# EAGLE board tinycopter_v2 (EAGLE 6.3)
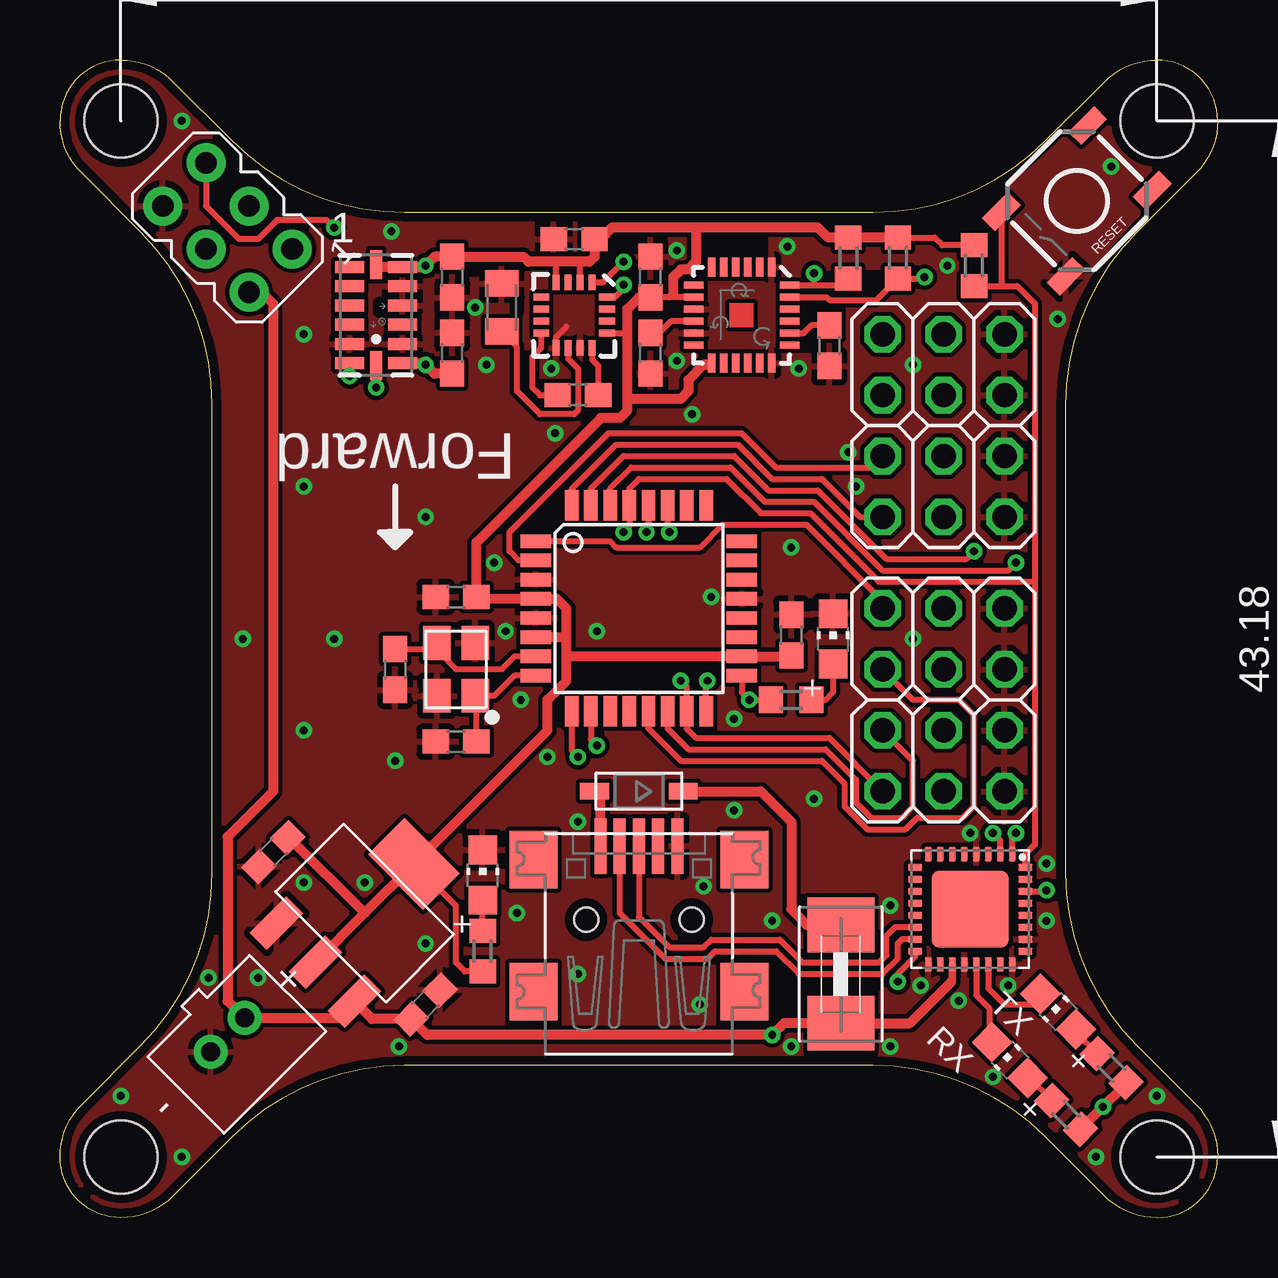
[diagram p0: board, top side]
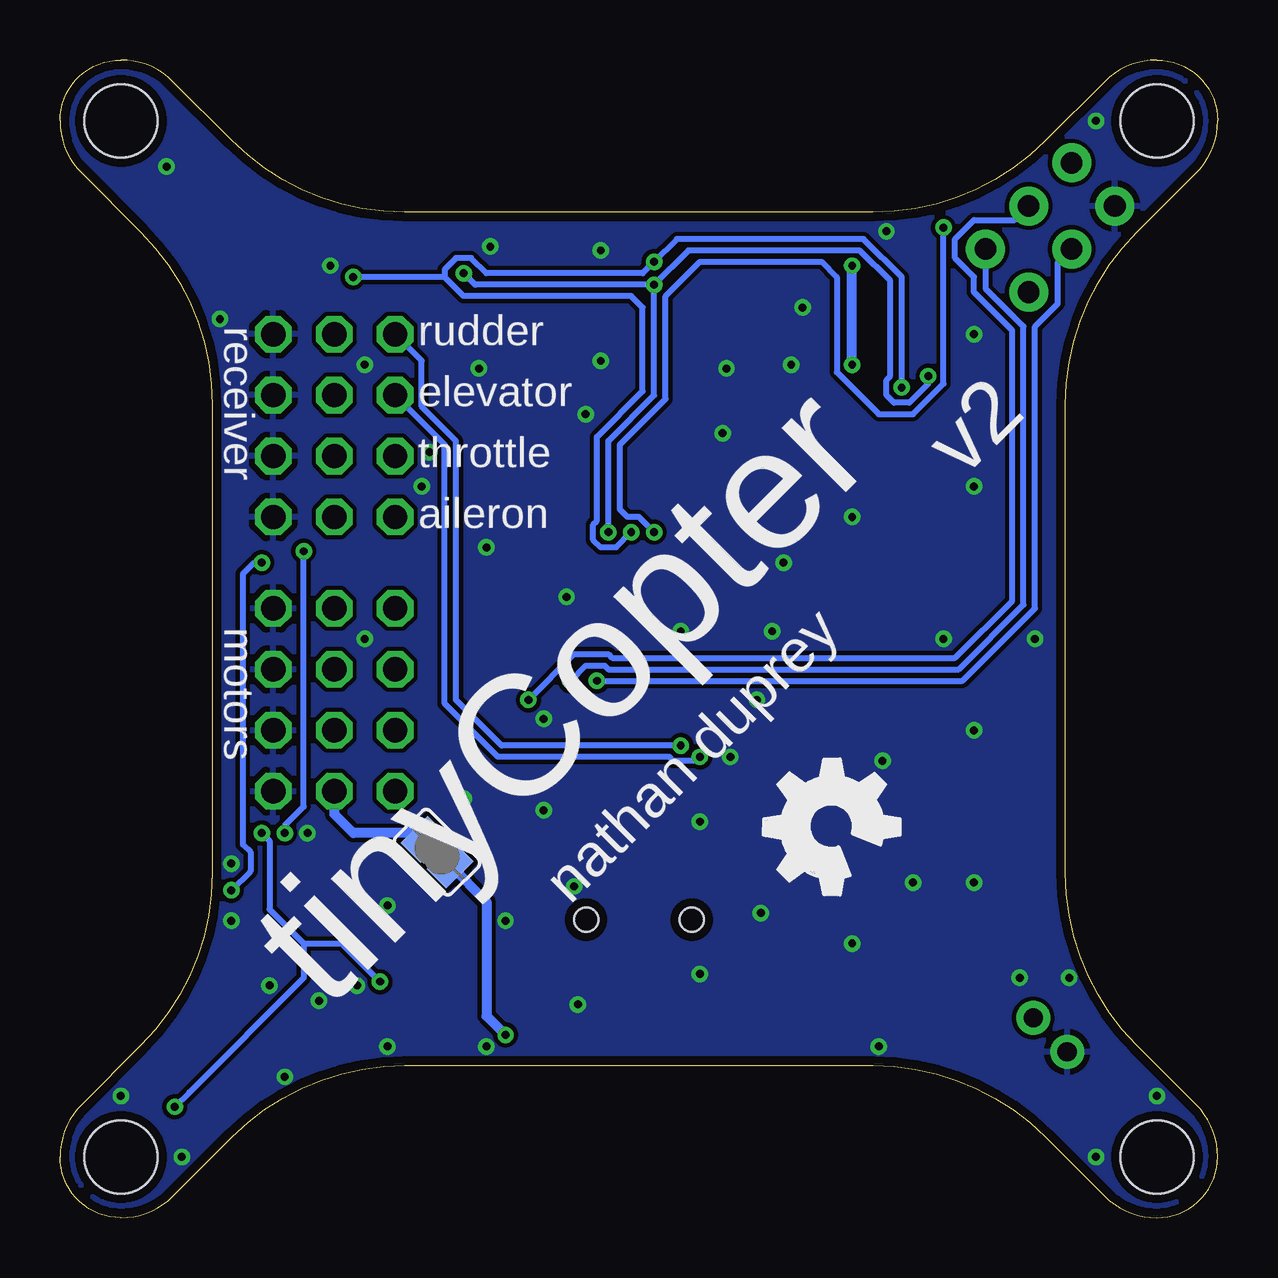
[diagram p1: board, bottom side, seen from below]

Size 48.26 x 48.26 mm. Coordinates in mm from the lower left corner, seen from the top.
Outline: 45.72,0 arc90 48.26,2.54 arc45 47.36,4.71 44.89,7.18 arc-45 41.91,14.37 41.91,33.89 arc-45 44.89,41.08 47.36,43.55 arc45 48.26,45.72 arc90 45.72,48.26 arc45 43.55,47.36 41.08,44.89 arc-45 33.89,41.91 14.37,41.91 arc-45 7.18,44.89 4.71,47.36 arc45 2.54,48.26 arc90 0,45.72 arc45 0.9,43.55 3.37,41.08 arc-45 6.35,33.89 6.35,14.37 arc-45 3.37,7.18 0.9,4.71 arc45 0,2.54 arc90 2.54,0 arc45 4.71,0.9 7.18,3.37 arc-45 14.37,6.35 33.89,6.35 arc-45 41.08,3.37 43.55,0.9 arc45 45.72,0
Copper layers (1*16): Top 0.0356mm / dielectric 1.5011mm / Bottom 0.0356mm
Design rules "LaenPCBOrder *": minimum track width 6mil, minimum drill 13mil, track to track 6mil, track to pad 6mil, pad to pad 6mil, via to via 6mil, smd to smd 6mil, copper to edge 15mil, drill to drill 6mil, minimum pad ring 7mil, minimum via ring 7mil, stop-mask expansion 4mil, vias tented up to drill 20mil, thermal gap 10mil
Holes 3.05 mm at 2.54,2.54 45.72,2.54 2.54,45.72 45.72,45.72
tRestrict: 9 lines

## Footprints (pad centres in the part's own frame; a part is rotated, then mirrored left to right if it is on the bottom)
LGA14 = smd 0.5 x 1.2: 1 2,1.1; 2 1.2,1.1; 3 0.4,1.1; 4 -0.4,1.1; 5 -1.2,1.1; 6 -2,1.1; 8 -2,-1.1; 9 -1.2,-1.1; 10 -0.4,-1.1; 11 0.4,-1.1; 12 1.2,-1.1; 13 2,-1.1 | smd 1.2 x 0.5: 7 -2.1,0; 14 2.1,0
AVRISP = drill 0.9 pad 1.626: 1 -1.27,2.54; 2 1.27,2.54; 3 -1.27,0; 4 1.27,0; 5 -1.27,-2.54; 6 1.27,-2.54
C0603 = smd 1.1 x 1: 1 -0.85,0; 2 0.85,0
C0805K = smd 1.1 x 1.4: 1 -1,0; 2 1,0
SOD-123 = smd 1.2 x 0.7: A 1.85,0; C -1.85,0
1812 = smd 2.286 x 2.794: 1 -2.046,0; 2 2.046,0
QFN-24 = smd 0.8 x 0.3: 1 -2,1.25; 2 -2,0.75; 3 -2,0.25; 4 -2,-0.25; 5 -2,-0.75; 6 -2,-1.25; 13 2,-1.25; 14 2,-0.75; 15 2,-0.25; 16 2,0.25; 17 2,0.75; 18 2,1.25 | smd 0.3 x 0.8: 7 -1.25,-2; 8 -0.75,-2; 9 -0.25,-2; 10 0.25,-2; 11 0.75,-2; 12 1.25,-2; 19 1.25,2; 20 0.75,2; 21 0.25,2; 22 -0.25,2; 23 -0.75,2; 24 -1.25,2
TQFP32-08 = smd 1.27 x 0.559: 1 -4.293,2.8; 2 -4.293,2; 3 -4.293,1.2; 4 -4.293,0.4; 5 -4.293,-0.4; 6 -4.293,-1.2; 7 -4.293,-2; 8 -4.293,-2.8; 17 4.293,-2.8; 18 4.293,-2; 19 4.293,-1.2; 20 4.293,-0.4; 21 4.293,0.4; 22 4.293,1.2; 23 4.293,2; 24 4.293,2.8 | smd 0.559 x 1.27: 9 -2.8,-4.293; 10 -2,-4.293; 11 -1.2,-4.293; 12 -0.4,-4.293; 13 0.4,-4.293; 14 1.2,-4.293; 15 2,-4.293; 16 2.8,-4.293; 25 2.8,4.293; 26 2,4.293; 27 1.2,4.293; 28 0.4,4.293; 29 -0.4,4.293; 30 -1.2,4.293; 31 -2,4.293; 32 -2.8,4.293
SOT223-3 = smd 1 x 2.15: 1 -2.3,-2.9; 2 0,-2.9; 3 2.3,-2.9 | smd 3.25 x 2.15: 4 0,2.9
QFN32 = smd 0.6 x 0.3: 1 -2.3,1.75; 2 -2.3,1.25; 3 -2.3,0.75; 4 -2.3,0.25; 5 -2.3,-0.25; 6 -2.3,-0.75; 7 -2.3,-1.25; 8 -2.3,-1.75; 17 2.3,-1.75; 18 2.3,-1.25; 19 2.3,-0.75; 20 2.3,-0.25; 21 2.3,0.25; 22 2.3,0.75; 23 2.3,1.25; 24 2.3,1.75 | smd 0.3 x 0.6: 9 -1.75,-2.3; 10 -1.25,-2.3; 11 -0.75,-2.3; 12 -0.25,-2.3; 13 0.25,-2.3; 14 0.75,-2.3; 15 1.25,-2.3; 16 1.75,-2.3; 25 1.75,2.3; 26 1.25,2.3; 27 0.75,2.3; 28 0.25,2.3; 29 -0.25,2.3; 30 -0.75,2.3; 31 -1.25,2.3; 32 -1.75,2.3 | smd 3.2 x 3.2: EXP 0,0
CHIP-LED0805 = smd 1.2 x 1.2: A 0,-1.05; C 0,1.05
16LPCC = smd 0.65 x 0.28: 1 -1.37,0.75; 2 -1.37,0.25; 3 -1.37,-0.25; 4 -1.37,-0.75; 9 1.37,-0.75; 10 1.37,-0.25; 11 1.37,0.25; 12 1.37,0.75 | smd 0.28 x 0.65: 5 -0.75,-1.37; 6 -0.25,-1.37; 7 0.25,-1.37; 8 0.75,-1.37; 13 0.75,1.37; 14 0.25,1.37; 15 -0.25,1.37; 16 -0.75,1.37
2X03 = drill 1.016 octagon: 1 -2.54,-1.27; 2 -2.54,1.27; 3 0,-1.27; 4 0,1.27; 5 2.54,-1.27; 6 2.54,1.27
JST-PH-2-THM = drill 0.8 pad 1.422: 1 1,0; 2 -1,0
TSX-3225 = smd 1.4 x 1.15: 1 -1.1,-0.8; 2 1.1,-0.8; 3 1.1,0.8; 4 -1.1,0.8
R0603 = smd 1 x 1.1: 1 -0.85,0; 2 0.85,0
TACTILE_SWITCH_SMD = smd 1.524 x 0.762: 1 -2.54,1.905; 2 2.54,1.905; 3 -2.54,-1.905; 4 2.54,-1.905
SJ = smd 1.168 x 1.6: 1 -0.762,0; 2 0.762,0
USB-MINIB = smd 0.5 x 2.308: D+ 0,4.064; D- -0.8,4.064; GND 1.6,4.064; ID 0.8,4.064; VBUS -1.6,4.064 | smd 2 x 2.4: GND1 -4.4,-2; GND2 -4.4,3.5; GND3 4.4,3.5; GND4 4.4,-2 | hole 1: -2.2,1; 2.2,1

## Placement (x,y rotation side)
ACCEL  ADXL345  [LGA14]  13.18,37.62 270 top
AVRISP  AVRISP-6  [AVRISP]  6.99,41.27 225 top
C1  .1uF  [C0603]  16.51,25.88 180 top
C2  .1uF  [C0603]  30.48,24.29 90 top
C3  .1uF  [C0603]  16.51,19.84 180 top
C4  .1uF  [C0603]  13.97,22.86 270 top
C5  .1uF  [C0603]  8.89,15.24 225 top
C6  .1uF  [C0603]  15.24,8.89 45 top
C7  4.7uF  [C0805K]  18.41,37.94 90 top
C8  .22uF  [C0603]  21.59,34.29 0 top
C9  .1uF  [C0603]  24.61,36.04 270 top
C10  2.2nF  [C0603]  32.07,36.35 270 top
C11  10nF  [C0603]  24.61,39.21 90 top
C12  .1uF  [C0603]  21.43,40.8 180 top
C13  .1uF  [C0603]  16.35,39.21 270 top
C14  .1uF  [C0603]  16.35,36.04 90 top
D1  [SOD-123]  24.13,17.78 180 top
F1  PTCSMD  [1812]  32.54,10.16 270 top
GYRO  ITG-3200  [QFN-24]  28.42,37.62 270 top
IC1  MEGA8-AI  [TQFP32-08]  24.13,25.4 0 top
IC3  AP1117E  [SOT223-3]  12.7,12.7 315 top
IC4  FT232RQ  [QFN32]  37.94,12.86 270 top
LED1  [CHIP-LED0805]  17.62,14.29 0 top
MAG  HMC5883LSMD  [16LPCC]  21.43,37.62 270 top
MOTORS  [2X03]  36.83,19.05 0 top
MOTORS1  [2X03]  36.83,24.13 0 top
PWR  [JST-PH-2-THM]  6.99,7.62 225 top
Q1  TSX-3225  [TSX-3225]  16.51,22.86 90 top
R1  10K  [R0603]  38.1,39.69 90 top
R2  4.7K  [R0603]  32.86,40.01 270 top
R3  4.7K  [R0603]  34.92,40.01 270 top
R4  82R  [R0603]  30.48,21.59 180 top
R6  82R  [R0603]  17.62,11.11 270 top
R7  82R  [R0603]  43.83,6.24 135 top
R8  82R  [R0603]  41.94,4.29 135 top
RESET  [TACTILE_SWITCH_SMD]  42.39,42.39 225 top
REVEIVER  [2X03]  36.83,30.48 0 top
REVEIVER1  [2X03]  36.83,35.56 0 top
RX  [CHIP-LED0805]  39.59,6.57 45 top
SJ1  [SJ]  32.54,15.24 135 bottom
STATUS1  [CHIP-LED0805]  32.23,24.13 0 top
TX  [CHIP-LED0805]  41.61,8.59 45 top
U$1  [OSHW_FILLX200_NOTEXT]  16.51,12.7 45 bottom
USB  [USB-MINIB]  24.13,11.43 0 top

## Library data of the parts
ACCEL GYRO MAG RESET = SparkFun
AVRISP USB = icsp
C1-C14 D1 F1 LED1 PWR R1-R4 R6-R8 RX STATUS1 TX = adafruit
IC1 = atmel; MPN: ATMEGA8-16AU; OC_FARNELL: 9171371; OC_NEWARK: 73M8863
IC3 = Diodes Inc
IC4 = ftdichip; MPN: FT232RQ; OC_FARNELL: 1146033; OC_NEWARK: 91K9919
MOTORS MOTORS1 REVEIVER REVEIVER1 = pinhead
Q1 = crystal
SJ1 = jumper
U$1 = ohw-logo

## Nets
+3V3: ACCEL.1 ACCEL.6 ACCEL.7 C1.1 C2.1 C5.1 C11.1 C12.1 C13.1 C14.1 GYRO.8 GYRO.13 IC1.4 IC1.6 IC1.18 IC3.2 IC3.4 MAG.2 MAG.4 MAG.13 R1.2 R2.1 R3.1 R6.2
AERILON: IC1.32 REVEIVER.1
D+: IC4.14 USB.D+
D-: IC4.15 USB.D-
ELEVATOR: IC1.9 REVEIVER1.1
GND: ACCEL.2 ACCEL.4 ACCEL.5 ACCEL.12 AVRISP.6 C1.2 C2.2 C3.2 C4.2 C5.2 C6.2 C7.2 C9.2 C10.2 C11.2 C12.2 C13.2 C14.2 GYRO.1 GYRO.9 GYRO.11 GYRO.18 IC1.3 IC1.5 IC1.21 IC3.1 IC4.4 IC4.17 IC4.20 IC4.24 IC4.26 LED1.C MAG.9 MAG.11 MOTORS1.5 MOTORS1.6 MOTORS.5 MOTORS.6 PWR.1 Q1.2 Q1.4 RESET.2 REVEIVER1.5 REVEIVER1.6 REVEIVER.5 REVEIVER.6 STATUS1.C USB.GND
MISO: AVRISP.1 IC1.16
MOTOR1: AVRISP.4 IC1.15 MOTORS.1
MOTOR2: IC1.14 MOTORS.2
MOTOR3: IC1.13 MOTORS1.1
MOTOR4: IC1.1 MOTORS1.2
N$1: C4.1 IC1.7 Q1.3
N$2: C3.1 IC1.8 Q1.1
N$3: R4.1 STATUS1.A
N$5: C10.1 GYRO.20
N$6: C7.1 MAG.10
N$7: C8.1 MAG.8
N$8: LED1.A R6.1
N$9: C8.2 MAG.12
N$10: C9.1 GYRO.10
N$11: IC4.22 TX.C
N$12: IC4.21 RX.C
N$13: R7.2 TX.A
N$14: D1.A USB.VBUS
N$15: R8.2 RX.A
N$16: D1.C F1.1
N$17: MOTORS.3 SJ1.2
RESET: AVRISP.5 IC1.29 IC4.32 R1.1 RESET.4
RUDDER: IC1.10 REVEIVER1.2
SCK: AVRISP.3 IC1.17 R4.2
SCL: ACCEL.14 GYRO.23 IC1.28 MAG.1 R3.2
SDA: ACCEL.13 GYRO.24 IC1.27 MAG.16 R2.2
THROTTLE: IC1.2 REVEIVER.2
USARTC0_RXD: IC1.30 IC4.30
USARTC0_TXD: IC1.31 IC4.2
VCCIO: IC4.1 IC4.16 R7.1 R8.1
VIN: AVRISP.2 C6.1 F1.2 IC3.3 IC4.19 PWR.2 SJ1.1

## Tracks (layer width: path | path; a pad name or v marks a point on that pad's centre or on a via)
+3V3  (via drill 0.33)
  Top 0.254: GYRO.8 25.4,38.37 | 25.4,38.37 24.62,38.37 C11.1 24.13,38.36 | C12.1 22.28,40.64 | 25.56,38.5 25.52,38.5 25.4,38.37 | GYRO.13 27.17,35.58 27.15,35.56 | MAG.4 20.68,39.8 20.64,39.85 | MAG.2 21.68,39.78 21.75,39.85 | MAG.13 23.61,36.87 23.65,36.83 | R6.2 16.88,10.26 16.51,10.64 16.51,12.99 IC3.4 | R3.1 36.46,40.85 36.77,40.54 R1.2
  Top 0.305: 27.15,35.56 26.99,35.56
  Top 0.406: R3.1 R2.1 32.01,40.85 31.59,41.27 26.51,41.27 | 26.51,41.27 23.02,41.27 22.54,40.8 22.44,40.8 22.28,40.64 22.28,40.06 22.07,39.85 21.75,39.85 20.64,39.85 19.53,39.85 19.31,40.06 C13.1 15.61,40.06 v15.24,39.69 15.18,39.62 ACCEL.6 13.28,39.62 ACCEL.7 | 26.51,41.27 26.51,39.85 26.19,39.53 25.88,39.53 25.56,39.21 25.56,38.5 | 26.99,35.56 26.83,35.56 26.19,34.92 26.19,34.45 25.88,34.13 23.65,34.13 | 23.65,34.13 23.65,33.66 23.34,33.34 22.54,33.34 17.36,28.16 C1.1 17.44,25.8 IC1.4 20.71,25.8 21.11,25.4 21.11,24.29 | 23.65,34.13 23.65,36.83 23.65,37.88 24.13,38.36 | ACCEL.1 15.18,35.62 v15.24,35.56 15.61,35.19 C14.1 | IC3.2 12.7,12.7 | 12.7,12.7 IC3.4 20.32,20.32 20.32,21.59 21.11,22.38 21.11,23.34 | C5.1 9.56,15.84 12.7,12.7 | IC1.6 21.02,24.2 21.11,24.29 | C2.1 30.44,23.4 IC1.18 21.18,23.4 21.11,23.34 | 21.11,23.34 21.11,24.29
  Bottom 0.406: v15.24,35.56 v15.24,39.69
AERILON
  Top 0.254: IC1.32 21.33,30.38 23.18,32.23 28.26,32.23 29.69,30.8 31.75,30.8 33.34,29.21 REVEIVER.1
D+
  Top 0.254: IC4.14 34.81,12.11 34.45,11.75 34.45,10.95 34.13,10.64 30.96,10.64 30,11.59 27.15,11.59 26.83,11.27 25.4,11.27 24.13,12.54 USB.D+
D-
  Top 0.254: USB.D- 23.33,12.71 25.24,10.79 26.99,10.79 27.3,11.11 29.84,11.11 30.8,10.16 34.29,10.16 34.92,10.79 34.92,11.43 35.1,11.61 IC4.15
ELEVATOR  (via drill 0.33)
  Top 0.254: IC1.9 21.33,19.47 v21.59,19.21
  Bottom 0.254: v21.59,19.21 21.75,19.05 22.7,19.05 22.86,19.21 30,19.21 32.23,21.43 32.23,32.23 REVEIVER1.1
GND  (via drill 0.33)
  Top 0.254: MAG.9 20.68,36.72 21.11,37.15
  other vias: 20.48,35.4 25.72,35.72 30.32,40.48 25.72,40.32 13.81,41.12 17.3,37.94 17.78,35.56 35.88,9.68 37.47,9.05 34.61,7.14 38.89,5.87 39.53,9.68 28.1,20.8 41.12,14.76 37.94,16.03 41.12,12.38 45.72,5.08 43.18,2.54 5.08,2.54 2.54,5.08 26.67,8.89 21.59,10.16 19.05,12.7 21.59,16.51 26.83,13.81 29.69,12.38 28.1,16.99 20.32,19.21 22.38,24.45 27.15,25.88 18.57,24.45 19.21,21.59 31.43,17.46 34.61,13.02 7.62,24.13 5.08,45.72 43.81,43.81 41.59,37.47 36.99,39.69 30.8,35.4 10.16,36.83 30.48,27.94 35.56,24.13 33.18,30.48 6.19,10 8.26,10 12.7,13.97 15.24,11.43 10.16,13.97 14.13,7.14 30.48,7.14 18.1,27.3 20.64,32.7 26.35,33.5 32.86,31.91 35.56,35.56 10.16,30.48 15.24,29.21 11.43,24.13 10.16,20.32 13.97,19.05
  pour Top (isolate 0.178): 7.18,3.37 arc-45 14.37,6.35 33.89,6.35 arc-45 41.08,3.37 43.55,0.9 arc45 45.72,0 arc90 48.26,2.54 arc45 47.36,4.71 44.89,7.18 arc-45 41.91,14.37 41.91,33.89 arc-45 44.89,41.08 47.36,43.55 arc45 48.26,45.72 arc90 45.72,48.26 arc45 43.55,47.36 41.08,44.89 arc-45 33.89,41.91 14.37,41.91 arc-45 7.18,44.89 4.71,47.36 arc45 2.54,48.26 arc90 0,45.72 arc45 0.9,43.55 3.37,41.08 arc-45 6.35,33.89 6.35,14.37 arc-45 3.37,7.18 0.9,4.71 arc45 0,2.54 arc90 2.54,0 arc45 4.71,0.9
  pour Bottom (isolate 0.178): 7.18,3.37 arc-45 14.37,6.35 33.89,6.35 arc-45 41.08,3.37 43.55,0.9 arc45 45.72,0 arc90 48.26,2.54 arc45 47.36,4.71 44.89,7.18 arc-45 41.91,14.37 41.91,33.89 arc-45 44.89,41.08 47.36,43.55 arc45 48.26,45.72 arc90 45.72,48.26 arc45 43.55,47.36 41.08,44.89 arc-45 33.89,41.91 14.37,41.91 arc-45 7.18,44.89 4.71,47.36 arc45 2.54,48.26 arc90 0,45.72 arc45 0.9,43.55 3.37,41.08 arc-45 6.35,33.89 6.35,14.37 arc-45 3.37,7.18 0.9,4.71 arc45 0,2.54 arc90 2.54,0 arc45 4.71,0.9
MISO  (via drill 0.33)
  Top 0.254: IC1.16 26.93,22.33 v26.99,22.38
  Bottom 0.254: v26.99,22.38 26.35,23.02 25.56,23.02 25.4,22.86 10.79,22.86 8.1,25.56 8.1,37.15 9.68,38.73 AVRISP.1
MOTOR1  (via drill 0.33)
  Top 0.254: MOTORS.1 32.07,20 26.51,20 26.13,20.38 IC1.15 26.13,22.13 v25.88,22.38
  Bottom 0.254: v25.88,22.38 10.64,22.38 7.62,25.4 7.62,37.15 6.67,38.1 6.67,39.8 AVRISP.4
MOTOR2
  Top 0.254: IC1.14 25.33,20.39 26.19,19.53 31.91,19.53 33.18,18.26 33.18,17.3 33.81,16.67 35.08,16.67 35.56,17.14 35.56,19.05 MOTORS.2
MOTOR3
  Top 0.254: IC1.13 24.53,20.4 25.88,19.05 31.75,19.05 32.7,18.1 32.7,17.14 33.66,16.19 35.24,16.19 35.72,16.67 37.62,16.67 38.1,17.14 38.1,20.95 37.47,21.59 35.56,21.59 MOTORS1.1
MOTOR4
  Top 0.254: MOTORS1.2 34.29,25.72 31.11,28.89 27.62,28.89 26.67,27.94 23.18,27.94 22.92,28.2 IC1.1
N$1
  Top 0.254: IC1.7 18.95,23.4 18.41,22.86 16.51,22.86 15.71,23.66 Q1.3 15.46,23.71 C4.1
N$2
  Top 0.254: IC1.8 18.95,22.6 18.11,21.76 17.78,21.76 | Q1.1 17.78,21.76 | C3.1 17.36,21.34 17.78,21.76
N$3
  Top 0.254: R4.1 31.91,21.59 32.23,21.91 STATUS1.A
N$5
  Top 0.254: GYRO.20 31,36.87 31.33,37.2 C10.1
N$6
  Top 0.254: MAG.10 21.18,35.81 21.59,35.4 21.59,33.66 21.43,33.5 20,33.5 19.05,34.45 19.05,36.31 C7.1
N$7
  Top 0.254: MAG.8 20.06,36.25 19.68,35.88 19.68,34.61 20,34.29 C8.1 | C8.1
N$8
  Top 0.254: R6.1 LED1.A
N$9
  Top 0.254: MAG.12 22.18,35.76 22.44,35.5 C8.2
N$10
  Top 0.254: GYRO.10 25.47,37.37 24.98,36.89 C9.1
N$11
  Top 0.254: IC4.22 38.69,9.57 39.37,8.89 40.8,8.89 40.8,9.26 TX.C
N$12
  Top 0.254: IC4.21 38.19,9.28 38.73,8.73 38.73,7.43 RX.C
N$13
  Top 0.254: TX.A 42.35,7.72 R7.2
N$14
  Top 0.406: USB.VBUS 22.53,17.53 D1.A
N$15
  Top 0.254: RX.A 40.39,5.83 R8.2
N$16
  Top 0.406: D1.C 29.21,17.78 30.48,16.51 30.48,12.86 31.13,12.21 F1.1
N$17
  Bottom 0.406: MOTORS.3 36.83,16.83 36.04,16.03 33.34,16.03 SJ1.2
RESET  (via drill 0.33)
  Top 0.254: RESET.4 39.24,38.87 39.21,38.84 | R1.1 39.21,38.84 | 39.21,38.84 39.9,38.84 40.64,38.1 40.64,26.51 | 40.64,26.51 34.13,26.51 31.27,29.37 29.21,29.37 27.78,30.8 24.13,30.8 23.73,30.4 IC1.29 23.73,28.81 v23.5,28.57 | 40.64,26.51 40.64,15.56 40.24,15.16 IC4.32 | v11.43,41.27 11.11,41.59 9.05,41.59 8.26,40.8 7.46,40.8 6.09,42.17 AVRISP.5
  Bottom 0.254: v23.5,28.57 24.13,29.21 24.61,29.21 24.92,29.53 24.92,32.23 23.02,34.13 23.02,38.42 21.59,39.85 16.51,39.85 15.88,39.21 15.88,35.24 14.13,33.5 12.7,33.5 11.43,34.77 v11.43,41.27
RUDDER  (via drill 0.33)
  Top 0.254: IC1.10 22.13,19.94 v22.38,19.68
  Bottom 0.254: v22.38,19.68 29.84,19.68 31.75,21.59 31.75,32.38 33.18,33.81 33.18,35.72 REVEIVER1.2
SCK  (via drill 0.33)
  Top 0.254: IC1.17 28.42,21.9 v28.73,21.59 R4.2 | R4.2
  Bottom 0.254: v28.73,21.59 26.83,23.5 25.4,23.5 25.24,23.34 10.95,23.34 8.57,25.72 8.57,36.99 10.16,38.58 10.16,39.21 10.95,40.01 10.95,40.8 10.16,41.59 8.46,41.59 AVRISP.3
SCL  (via drill 0.33)
  Top 0.254: GYRO.23 31.95,38.37 32.07,38.26 34.03,38.26 R3.2 35.98,39.16 v36.04,39.21 | MAG.1 22.64,38.99 v23.5,39.85 | ACCEL.14 v13.18,34.61 | v13.18,34.61 | IC1.28 24.53,28.66 v24.45,28.57
  Bottom 0.254: v13.18,34.61 13.18,39.21 14.76,40.8 22.54,40.8 v23.5,39.85 23.97,39.37 30.48,39.37 31.11,40.01 31.75,40.01 32.23,39.53 32.23,39.21 | 32.23,39.21 31.43,38.42 24.45,38.42 23.97,37.94 23.97,34.45 25.88,32.54 25.88,29.05 26.04,28.89 26.04,28.26 25.72,27.94 25.08,27.94 v24.45,28.57 | 32.23,39.21 v36.04,39.21
SDA  (via drill 0.33)
  Top 0.254: GYRO.24 31.43,38.87 | 31.43,38.87 32.58,38.87 R2.2 | MAG.16 23.13,38.37 23.5,38.73 v23.5,38.89 | 31.43,38.89 v31.43,39.37 31.43,38.87 | ACCEL.13 12.08,35.09 v12.06,35.08 | IC1.27 25.33,28.64 v25.4,28.57
  Bottom 0.254: v23.5,38.89 30.96,38.89 v31.43,39.37 | v12.06,35.08 12.06,34.77 12.86,33.97 13.49,33.97 13.81,34.29 13.81,34.92 13.65,35.08 13.65,39.05 14.92,40.32 22.07,40.32 v23.5,38.89 | v23.5,38.89 23.5,34.29 25.4,32.38 v25.4,28.57
THROTTLE
  Top 0.254: IC1.2 19.11,27.4 18.73,27.78 18.73,28.57 22.86,32.7 28.42,32.7 29.84,31.27 33.81,31.27 REVEIVER.2
USARTC0_RXD  (via drill 0.33)
  Top 0.254: IC1.30 22.93,30.39 23.81,31.27 27.94,31.27 29.37,29.84 31.43,29.84 34.29,26.99 39.53,26.99 v39.85,27.3 | IC4.30 41.07,13.61 v41.12,13.65
  Bottom 0.254: v39.85,27.3 40.16,27.3 40.64,26.83 40.64,15.56 40.32,15.24 40.32,14.45 v41.12,13.65
USARTC0_TXD  (via drill 0.33)
  Top 0.254: IC4.2 39.19,15.74 v38.89,16.03 | IC1.31 22.13,30.39 23.5,31.75 28.1,31.75 29.53,30.32 31.59,30.32 34.45,27.46 37.78,27.46 v38.1,27.78
  Bottom 0.254: v38.89,16.03 38.89,16.35 38.1,17.14 v38.1,27.78
VCCIO  (via drill 0.33)
  Top 0.254: IC4.16 35.64,10.88 34.92,10.16 v34.92,9.84 | IC4.1 39.69,15.88 v39.85,16.03 | 43.5,4.6 43.5,4.64 43.56,4.7 | v43.48,4.62 44.19,5.34
  Top 0.406: R7.1 44.44,5.58 44.19,5.34 43.56,4.7 v43.48,4.62 R8.1
  Bottom 0.254: 38.1,11.43 39.53,12.86 39.53,15.72 v39.85,16.03 | 38.1,11.43 36.51,11.43 v34.92,9.84 | 38.1,11.43 38.1,10 42.86,5.24 | 42.86,5.24 | 42.86,5.24 v43.48,4.62
VIN  (via drill 0.33)
  Top 0.305: IC4.19 37.19,9.89 37.15,9.84
  Top 0.406: 37.15,9.84 35.42,8.11 F1.2 30.18,8.11 v29.69,7.62 15.31,7.62 C6.1 13.01,8.29 IC3.3 11.58,8.33 PWR.2 6.99,9.03 6.99,15.88 8.89,17.78 8.89,38.1 8.41,38.58 AVRISP.2
  Bottom 0.406: SJ1.1 30.48,13.18 30.48,8.41 v29.69,7.62

## Text on the board
tPlace: 1
bPlace: receiver | rudder | elevator | throttle | aileron | motors | nathan duprey | tinyCopter
tNames: Forward
bNames: v2